# EAGLE board linearSensor (EAGLE 7.1.0)
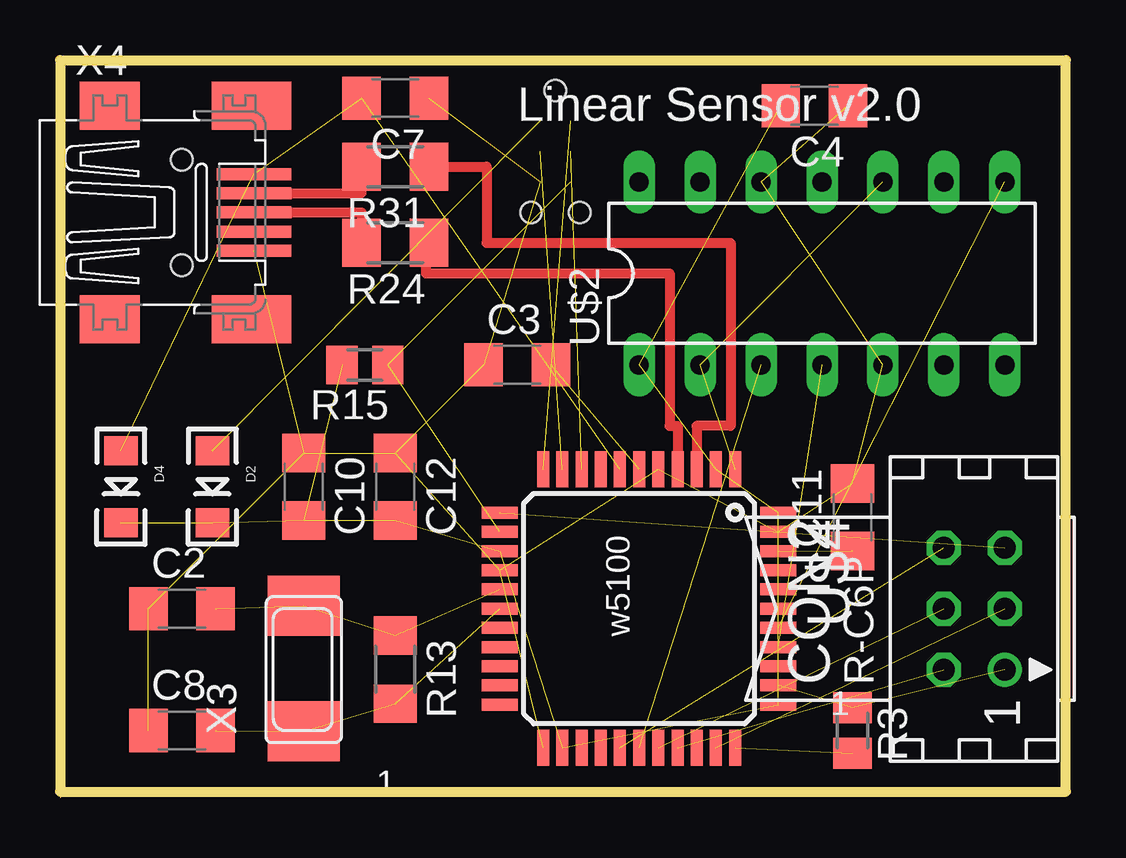
[diagram p0: board, top side]
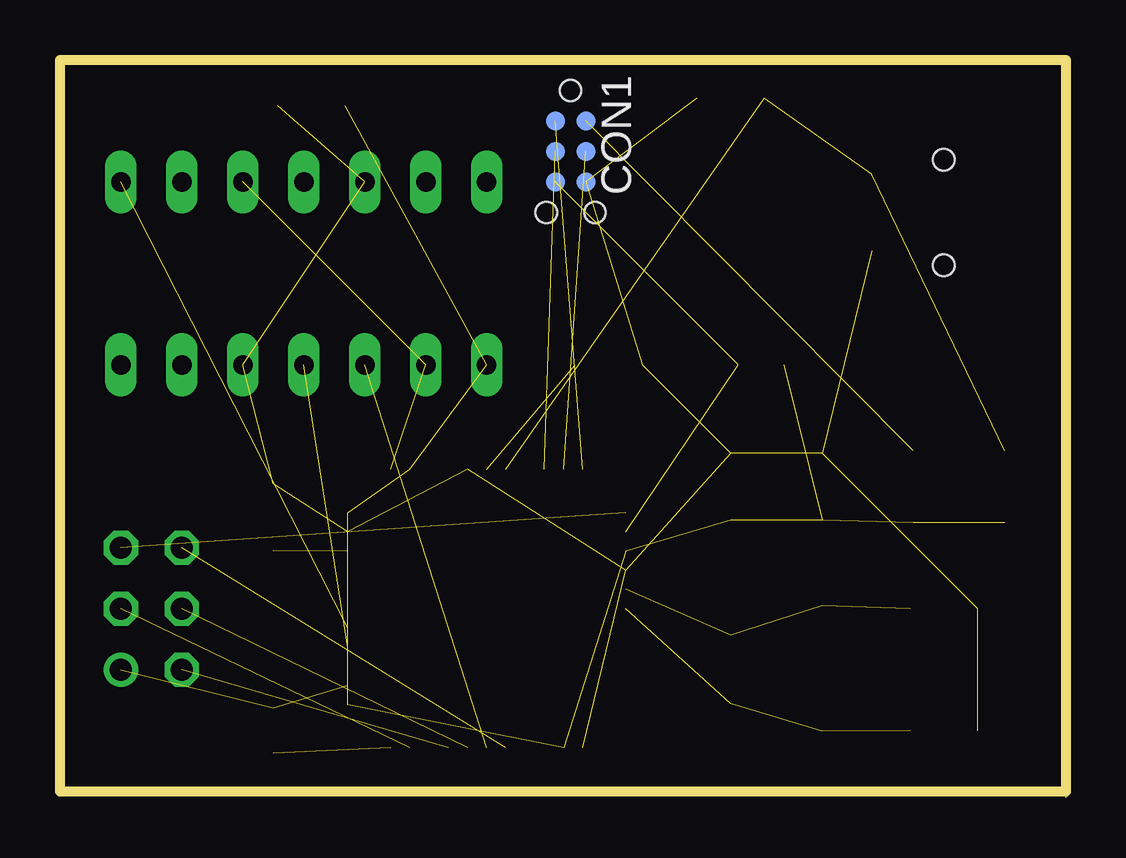
[diagram p1: board, bottom side, seen from below]

Size 41.91 x 30.73 mm. Coordinates in mm from the lower left corner, seen from the top.
Outline: 0,0.25 0,0
Outline: 0,0.25 0,30.73 41.91,30.73 41.91,0.25 0,0.25
Copper layers (1*16): Top 0.035mm / dielectric 1.5mm / Bottom 0.035mm
Design rules "Fusion_eagle_rule_v1.1": minimum track width 6mil, minimum drill 12mil, track to track 6mil, track to pad 6mil, pad to pad 6mil, via to via 6mil, smd to smd 0mil, copper to edge 10mil, drill to drill 10mil, minimum pad ring 10mil, minimum via ring 6mil, stop-mask expansion 2mil, vias tented up to drill 100mil, thermal gap 10mil
Net classes: 0 default: width 0.305 mm; 1 power: width 0.457 mm; 2 VIN: width 0.457 mm; 3 fine: width 0.305 mm; 4 aref: width 0.305 mm
vRestrict: area 16.5,0.3 to 31.8,4.1; area 16.5,1.5 to 20.3,15.5; area 27.9,2.8 to 31.8,15.5; area 16.5,11.7 to 31.8,15.5

## Footprints (pad centres in the part's own frame; a part is rotated, then mirrored left to right if it is on the bottom)
C1206 = smd 1.6 x 1.8: 1 -1.4,0; 2 1.4,0
TC2030-MCP-NL = smd 0.787 x 0.787: 5V 1.27,0.635; GND 3.81,0.635; MISO 1.27,-0.635; MOSI 2.54,0.635; RESET 3.81,-0.635; SCK 2.54,-0.635 | hole 0.889: 0,0; 5.08,-1.016; 5.08,1.016
CON06 = drill 0.914: 1 -2.54,-1.27 | drill 0.914 octagon: 2 -2.54,1.27; 3 0,-1.27; 4 0,1.27; 5 2.54,-1.27; 6 2.54,1.27
LED-1206 = smd 1.2 x 1.4: A -1.5,0; C 1.5,0
M0805 = smd 1.3 x 1.6: 1 -0.95,0; 2 0.95,0
R1206 = smd 1.6 x 1.803: 1 -1.422,0; 2 1.422,0
M1206 = smd 1.6 x 2: 1 -1.4,0; 2 1.4,0
DIL14 = drill 0.813 long: 1 -7.62,-3.81; 2 -5.08,-3.81; 3 -2.54,-3.81; 4 0,-3.81; 5 2.54,-3.81; 6 5.08,-3.81; 7 7.62,-3.81; 8 7.62,3.81; 9 5.08,3.81; 10 2.54,3.81; 11 0,3.81; 12 -2.54,3.81; 13 -5.08,3.81; 14 -7.62,3.81
TQFP44 = smd 1.5 x 0.5: 1 -5.8,4; 2 -5.8,3.2; 3 -5.8,2.4; 4 -5.8,1.6; 5 -5.8,0.8; 6 -5.8,0; 7 -5.8,-0.8; 8 -5.8,-1.6; 9 -5.8,-2.4; 10 -5.8,-3.2; 11 -5.8,-4; 23 5.8,-4; 24 5.8,-3.2; 25 5.8,-2.4; 26 5.8,-1.6; 27 5.8,-0.8; 28 5.8,0; 29 5.8,0.8; 30 5.8,1.6; 31 5.8,2.4; 32 5.8,3.2; 33 5.8,4 | smd 0.5 x 1.5: 12 -4,-5.8; 13 -3.2,-5.8; 14 -2.4,-5.8; 15 -1.6,-5.8; 16 -0.8,-5.8; 17 0,-5.8; 18 0.8,-5.8; 19 1.6,-5.8; 20 2.4,-5.8; 21 3.2,-5.8; 22 4,-5.8; 34 4,5.8; 35 3.2,5.8; 36 2.4,5.8; 37 1.6,5.8; 38 0.8,5.8; 39 0,5.8; 40 -0.8,5.8; 41 -1.6,5.8; 42 -2.4,5.8; 43 -3.2,5.8; 44 -4,5.8
NX6035 = smd 2.5 x 3: P$1 2.665,0; P$2 -2.565,0
32005-201 = smd 3.1 x 0.5: 1 3,1.6; 2 3,0.8; 3 3,0; 4 3,-0.8; 5 3,-1.6 | smd 2.5 x 2: M1 -3,-4.45; M2 -3,4.45 | smd 3.3 x 2: M3 2.9,4.45; M4 2.9,-4.45 | hole 0.9: 0,2.2; 0,-2.2

## Placement (x,y rotation side)
C2  22pF  [C1206]  5.08,7.87 0 top
C3  100nF  [C1206]  19.05,18.03 0 top
C4  100nF  [C1206]  31.43,28.83 180 top
C7  10uF  [C1206]  13.97,29.15 180 top
C8  22pF  [C1206]  5.08,2.79 0 top
C10  10uF  [C1206]  10.16,12.95 270 top
C11  100nF  [C1206]  33.02,11.68 90 top
C12  100nF  [C1206]  13.97,12.95 270 top
CON1  SPI  [TC2030-MCP-NL]  20.64,29.46 270 bottom
CON2  [CON06]  38.1,7.87 90 top
D2  1N581  [LED-1206]  6.35,12.95 270 top
D4  1N581  [LED-1206]  2.54,12.95 270 top
R3  10k  [M0805]  33.02,2.79 270 top
R13  1M  [R1206]  13.97,5.33 270 top
R15  10k  [M0805]  12.7,18.03 180 top
R24  22  [M1206]  13.97,23.11 180 top
R31  22  [M1206]  13.97,26.29 180 top
U$2  TSL1402R  [DIL14]  31.75,21.84 0 top
U$4  32U4  [TQFP44]  24.13,7.87 270 top
X3  16MHz  [NX6035]  10.16,5.33 90 top
X4  MINI-USB  [32005-201]  5.08,24.38 0 top

## Library data of the parts
C2-C4 C7 C8 C10-C12 R13 = rcl
CON1 D2 D4 U$2 X3 = lpatiny
CON2 = con-harting; OC_FARNELL: unknown; OC_NEWARK: unknown
R3 R15 R24 R31 = resistor
U$4 = adafruit
X4 = con-cypressindustries; OC_FARNELL: unknown; OC_NEWARK: unknown

## Nets
+5V/1 [fine]: C4.2 C10.2 C12.2 D2.C D4.C R15.2 U$2.1 U$4.2 U$4.14 U$4.24 U$4.34 U$4.44
A0: U$4.36
A1: U$2.4 U$4.37
A2: U$2.8 U$4.38
A3: U$4.39
A4: U$4.40
A5: U$4.41
AREF: C11.1 U$4.42
CS: U$4.25
D5*: U$4.31
D6*: CON2.6 U$4.27
D7*: U$2.2 U$2.10 U$4.1
D8*: U$2.3 U$4.28
D9*: CON2.4 U$4.29
D10*: CON2.2 U$4.30
D11*: CON2.5 U$4.12
D12*: U$4.26
D13*: CON2.3 U$4.32
D+USB: R24.2 X4.3
D-USB: R31.2 X4.2
GND [power]: C2.1 C3.1 C4.1 C7.1 C8.1 C10.1 C11.2 C12.1 CON1.GND CON2.1 R3.1 U$2.5 U$2.12 U$4.5 U$4.15 U$4.23 U$4.35 U$4.43 X4.5
HWB: R3.2 U$4.33
ISP+5V: CON1.5V D2.A
MISO: CON1.MISO U$4.11
MOSI: CON1.MOSI U$4.10
N$16: C3.2 U$4.6
N$42: C8.2 R13.2 U$4.17 X3.P$2
RD+: R24.1 U$4.4
RD-: R31.1 U$4.3
RESET: CON1.RESET R15.1 U$4.13
RX: U$4.20
RXLED: U$4.8
SCK: CON1.SCK U$4.9
SCL: U$4.18
SDA: U$4.19
TX: U$4.21
TXLED: U$4.22
VUSB: C7.2 D4.A U$4.7 X4.1
XTAL1: C2.2 R13.1 U$4.16 X3.P$1

## Tracks (layer width: path | path; a pad name or v marks a point on that pad's centre or on a via)
+5V/1  (11 unrouted)
A1  (1 unrouted)
A2  (1 unrouted)
AREF  (1 unrouted)
D6*  (1 unrouted)
D7*  (2 unrouted)
D8*  (1 unrouted)
D9*  (1 unrouted)
D10*  (1 unrouted)
D11*  (1 unrouted)
D13*  (1 unrouted)
D+USB
  Top 0.406: X4.3 12.57,24.38 R24.2
D-USB
  Top 0.406: X4.2 12.57,25.18 R31.2
GND  (18 unrouted)
HWB  (1 unrouted)
ISP+5V  (1 unrouted)
MISO  (1 unrouted)
MOSI  (1 unrouted)
N$16  (1 unrouted)
N$42  (3 unrouted)
RD+
  Top 0.406: U$4.4 25.73,15.49 25.4,15.49 25.4,21.84 15.24,21.84 15.24,23.11 R24.1
RD-
  Top 0.406: R31.1 17.78,26.29 17.78,23.11 27.94,23.11 27.94,15.49 26.53,15.49 U$4.3
RESET  (2 unrouted)
SCK  (1 unrouted)
VUSB  (3 unrouted)
XTAL1  (3 unrouted)

## Text on the board
tPlace: Linear Sensor v2.0
tNames: w5100 | 1 | 1
203bmp: C:/Users/G/Pictures/logo_epfl.bmp